# Altium PCB PowerPCB1.PcbDoc (part 2 of 2)
Units mm, origin at the board's own origin, x right, y up, seen from the top; angles counter-clockwise.
Board outline 99.06 x 99.06 mm, 2 copper layers (Top Layer, Bottom Layer); 136 components, 79 nets, 365 pads, 730 vias.
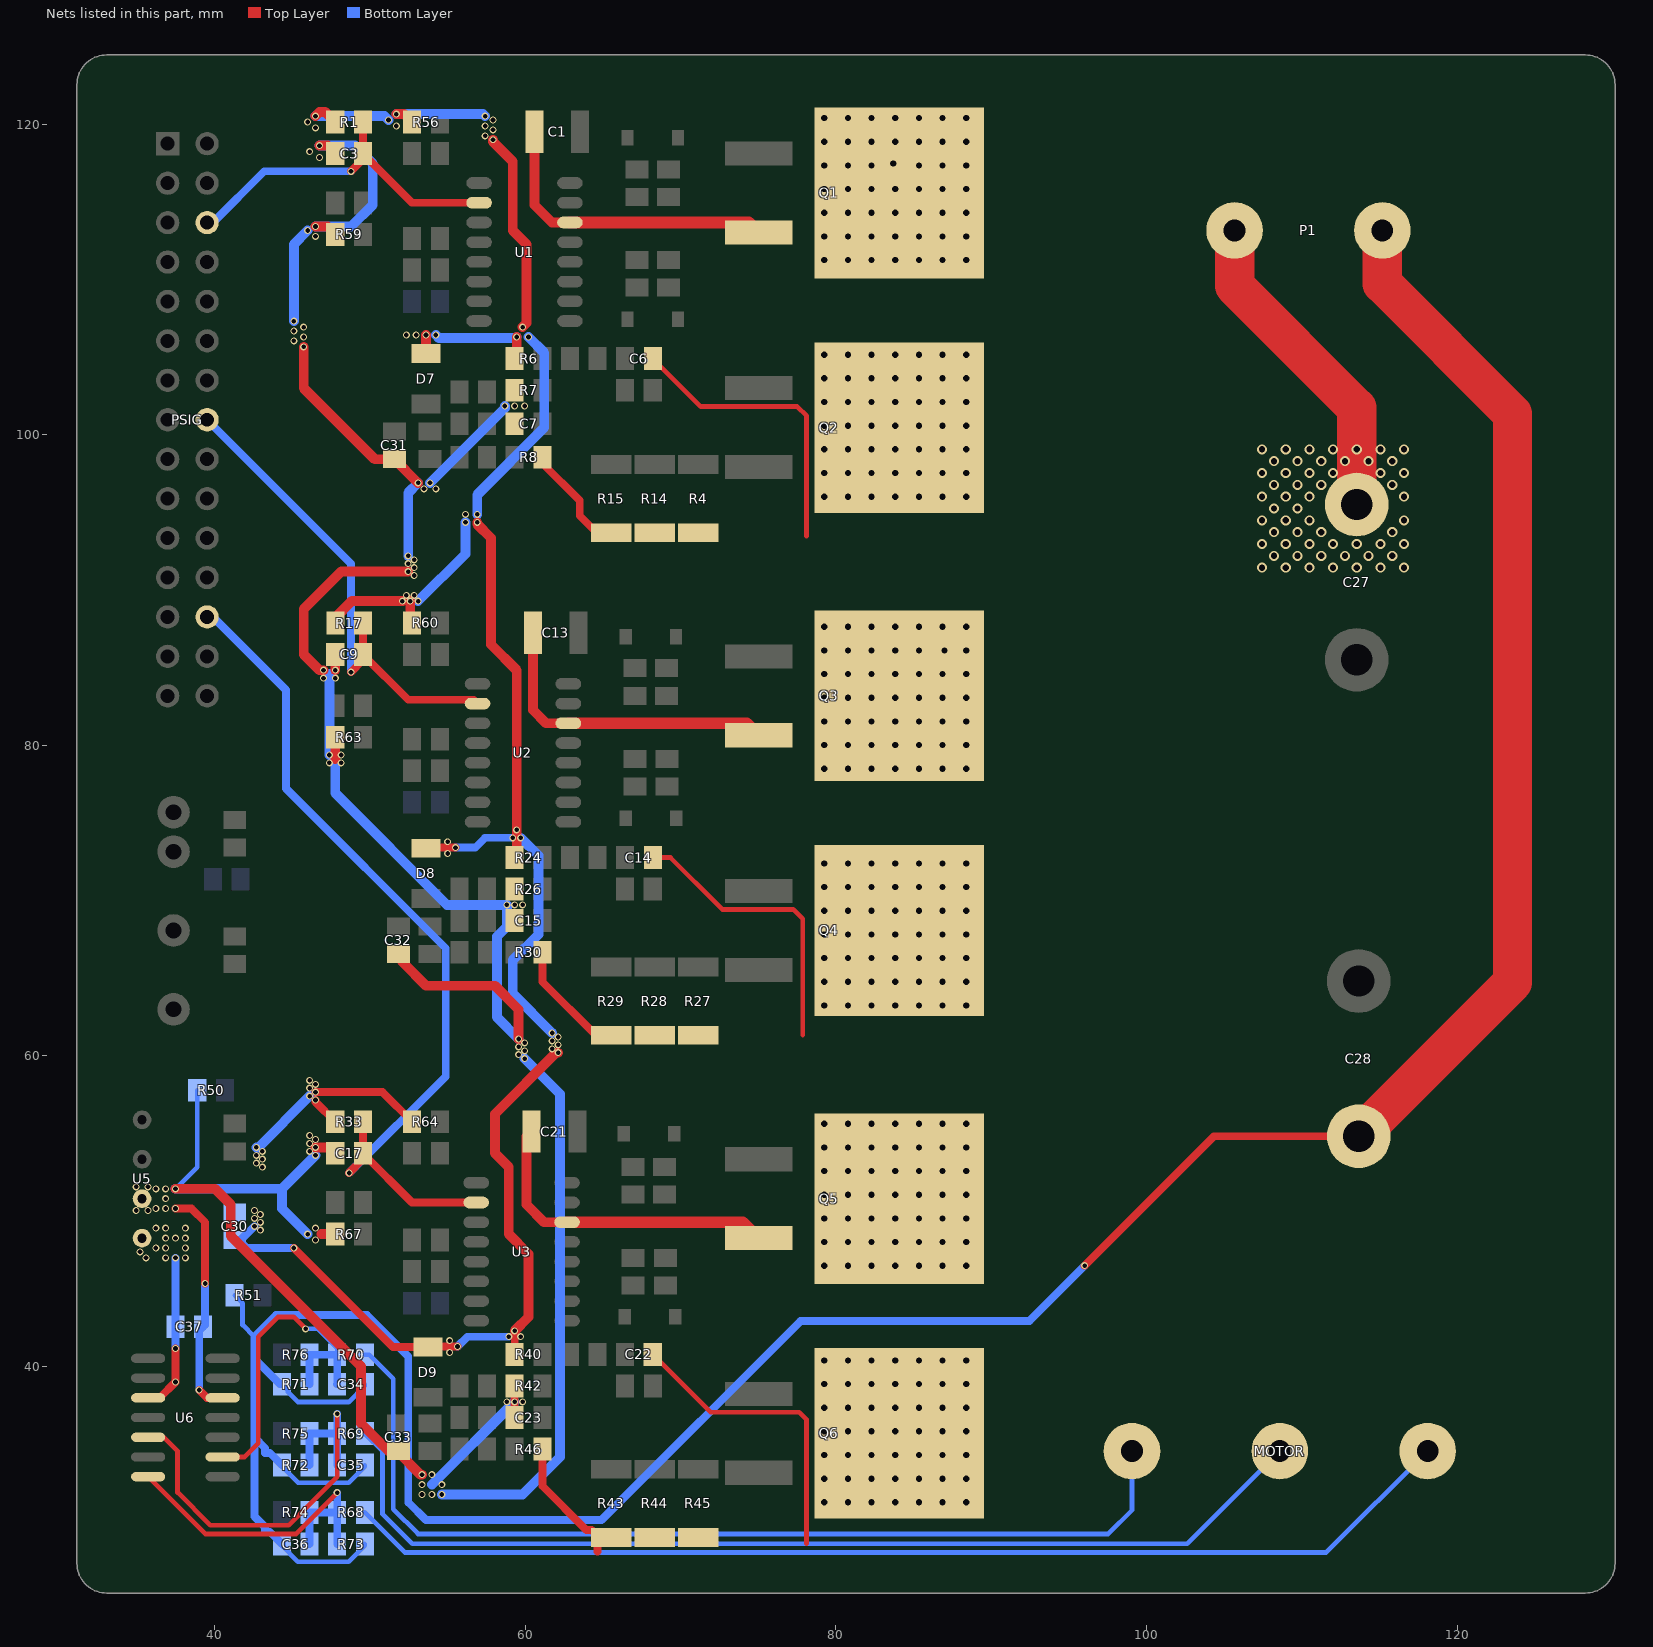
[diagram p2: the nets of this part, all layers, seen from the top]

## Via types
v1: diameter 0.45, hole 0.3, Top Layer to Bottom Layer, 379 vias
v2: diameter 0.65, hole 0.4, Top Layer to Bottom Layer, 351 vias

## Nets (pads, with @x,y where several pads share a name; then routed paths per layer and width w, separated by ;. In a path a pad name is that pad's centre, name@x,y a point inside that pad or via, vN(x,y) a via of type N, cw(c..) or ccw(c..) an arc to the next point about the centre after c; other vN are vias at no path point) (continued)
OUTA: C1.1 MOTOR.1 Q1.S Q2.D R68.2 U1.14 | length 92.1
  Top Layer w0.635: C1.1@60.579,119.507 60.579,114.808 61.714,113.673 U1.14@62.865,113.673
  Top Layer w0.762: U1.14@62.865,113.673 74.381,113.673 Q1.S@75.024,113.03
  Bottom Layer w0.305: R68.2@49.656,30.59 52.23,28.016 111.577,28.016 MOTOR.1@118.105,34.544
  other v2: 79.248,96.012 80.772,96.012 82.296,96.012 83.82,96.012 85.344,96.012 86.868,96.012 88.392,96.012 79.248,97.536 80.772,97.536 82.296,97.536 83.82,97.536 85.344,97.536 86.868,97.536 88.392,97.536 79.248,99.06 80.772,99.06 82.296,99.06 83.82,99.06 85.344,99.06 86.868,99.06 88.392,99.06 79.248,100.584 80.772,100.584 82.296,100.584 83.82,100.584 85.344,100.584 86.868,100.584 88.392,100.584 79.248,102.108 80.772,102.108 82.296,102.108 83.82,102.108 85.344,102.108 86.868,102.108 88.392,102.108 79.248,103.632 80.772,103.632 82.296,103.632 83.82,103.632 85.344,103.632 86.868,103.632 88.392,103.632 79.248,105.156 80.772,105.156 82.296,105.156 83.82,105.156 85.344,105.156 86.868,105.156 88.392,105.156
OUTB: C13.1 MOTOR.2 Q3.S Q4.D R69.2 U2.14 | length 86.9
  Top Layer w0.635: C13.1@60.478,87.249 60.478,82.27 61.333,81.415 U2.14@62.764,81.415
  Top Layer w0.762: U2.14@62.764,81.415 74.254,81.415 Q3.S@75.024,80.645
  Bottom Layer w0.305: R69.2@49.657,35.67 50.8,34.527 50.8,30.48 52.705,28.575 102.616,28.575 MOTOR.2@108.585,34.544
  other v2: 79.248,63.246 80.772,63.246 82.296,63.246 83.82,63.246 85.344,63.246 86.868,63.246 88.392,63.246 79.248,64.77 80.772,64.77 82.296,64.77 83.82,64.77 85.344,64.77 86.868,64.77 88.392,64.77 79.248,66.294 80.772,66.294 82.296,66.294 83.82,66.294 85.344,66.294 86.868,66.294 88.392,66.294 79.248,67.818 80.772,67.818 82.296,67.818 83.82,67.818 85.344,67.818 86.868,67.818 88.392,67.818 79.248,69.342 80.772,69.342 82.296,69.342 83.82,69.342 85.344,69.342 86.868,69.342 88.392,69.342 79.248,70.866 80.772,70.866 82.296,70.866 83.82,70.866 85.344,70.866 86.868,70.866 88.392,70.866 79.248,72.39 80.772,72.39 82.296,72.39 83.82,72.39 85.344,72.39 86.868,72.39 88.392,72.39
OUTC: C21.1 MOTOR.3 Q5.S Q6.D R70.2 U3.14 | length 84.2
  Top Layer w0.635: C21.1@60.392,55.118 60.071,54.797 60.071,50.419 61.206,49.284 U3.14@62.678,49.284
  Top Layer w0.762: U3.14@62.678,49.284 74,49.284 Q5.S@75.024,48.26
  Bottom Layer w0.305: R70.2@49.656,40.75 49.928,40.75 51.486,39.192 51.486,30.81 53.086,29.21 97.536,29.21 99.065,30.739 MOTOR.3@99.065,34.544
  other v2: 79.248,31.242 80.772,31.242 82.296,31.242 83.82,31.242 85.344,31.242 86.868,31.242 88.392,31.242 79.248,32.766 80.772,32.766 82.296,32.766 83.82,32.766 85.344,32.766 86.868,32.766 88.392,32.766 79.248,34.29 80.772,34.29 82.296,34.29 83.82,34.29 85.344,34.29 86.868,34.29 88.392,34.29 79.248,35.814 80.772,35.814 82.296,35.814 83.82,35.814 85.344,35.814 86.868,35.814 88.392,35.814 79.248,37.338 80.772,37.338 82.296,37.338 83.82,37.338 85.344,37.338 86.868,37.338 88.392,37.338 79.248,38.862 80.772,38.862 82.296,38.862 83.82,38.862 85.344,38.862 86.868,38.862 88.392,38.862 79.248,40.386 80.772,40.386 82.296,40.386 83.82,40.386 85.344,40.386 86.868,40.386 88.392,40.386
PGND: C6.2 C14.2 C22.2 C28.2 C34.2 C35.2 C36.2 P1.1 R4.2 R8.1 R14.2 R15.2 R27.2 R28.2 R29.2 R30.1 R43.2 R44.2 R45.2 R46.1 R51.2 R71.2 R72.2 R73.2 | length 280.9
  Top Layer w0.305: C22.2@68.199,40.767 71.92,37.046 77.635,37.046 78.105,36.576 78.105,28.575 ; C14.2@68.2,72.771 69.342,72.771 72.443,69.67 72.443,69.669 72.681,69.431 77.254,69.431 77.851,68.834 77.851,61.341 ; C6.2@68.2,104.902 71.286,101.816 77.508,101.816 78.105,101.219 78.105,93.472
  Top Layer w0.508: R46.1@61.087,34.671 61.087,32.302 63.925,29.464 64.262,29.464 64.643,29.083 64.643,28.067 ; R30.1@61.087,66.675 61.087,64.77 64.538,61.319 R29.2@64.852,61.319 ; R8.1@61.087,98.552 61.087,98.171 63.5,95.758 63.5,94.786 64.601,93.685 R15.2@65.532,93.685 ; v1(96.012,46.482) 104.347,54.817 C28.2@113.665,54.817
  Top Layer w2.54: C28.2@113.665,54.817 123.571,64.723 123.571,101.346 115.189,109.728 P1.1@115.189,113.157
  Bottom Layer w0.305: R51.2@41.274,44.577 41.783,44.068 41.783,42.67 42.544,41.909 ; R71.2@44.319,38.845 44.703,38.461 44.703,38.351 45.352,37.702 48.622,37.702 49.655,38.735 C34.2@49.655,38.845 ; R72.2@44.321,33.638 44.321,33.528 45.354,32.495 48.624,32.495 49.657,33.528 C35.2@49.657,33.638 ; C36.2@44.322,28.558 44.322,28.431 45.338,27.415 48.625,27.415 49.658,28.448 R73.2@49.658,28.558
  Bottom Layer w0.508: R71.2@44.319,38.845 44.191,38.845 42.544,40.491 ; R72.2@44.321,33.638 43.532,34.427 43.233,34.427 43.233,34.726 42.544,35.415 ; C36.2@44.322,28.558 43.533,29.347 43.232,29.347 43.232,29.648 42.544,30.336 42.544,35.415 ; v1(96.012,46.482) 92.456,42.926 77.724,42.926 64.897,30.099 53.594,30.099 52.451,31.242 52.451,40.64 49.784,43.307 43.942,43.307 42.544,41.909 42.544,40.491 ; 42.544,35.415 42.544,40.491
PHASE_A: C36.1 R68.1 R73.1 R74.2 U6.7 | length 21.9
  Top Layer w0.305: U6.7@35.7,32.893 39.383,29.21 45.228,29.21 v1(47.878,31.86)
  Bottom Layer w0.508: C36.1@46.102,28.558 46.1,28.56 R74.2@46.1,30.59 R68.1@47.876,30.59 ; R73.1@47.878,28.558 47.876,28.56 R68.1@47.876,30.59 ; v1@47.878,31.834 47.876,31.832 R68.1@47.876,30.59
PHASE_B: C35.1 R69.1 R72.1 R75.2 U6.5 | length 28.5
  Top Layer w0.305: U6.5@35.7,35.433 36.703,35.433 37.592,34.544 37.592,31.877 39.7,29.769 44.755,29.769 47.878,32.892 v1(47.878,36.94)
  Bottom Layer w0.508: R72.1@46.101,33.638 R75.2@46.101,35.67 R69.1@47.877,35.67 ; C35.1@47.877,33.638 R69.1@47.877,35.67 ; v1(47.878,36.94) 47.878,35.671 R69.1@47.877,35.67
PHASE_C: C34.1 R70.1 R71.1 R76.2 U6.9 | length 22
  Top Layer w0.305: U6.9@40.5,34.163 41.91,34.163 42.799,35.052 42.799,41.91 44.069,43.18 45.085,43.18 v1(45.847,42.418)
  Bottom Layer w0.305: v1(45.847,42.418) 46.609,42.418 47.876,41.151 R70.1@47.876,40.75
  Bottom Layer w0.508: R71.1@46.099,38.845 R76.2@46.099,40.75 R70.1@47.876,40.75 47.876,38.846 C34.1@47.875,38.845
PVCC: C27.1 P1.2 Q1.D Q3.D Q5.D | length 28.4
  Top Layer w2.54: Q3.D@84.074,83.185 v2(86.995,86.106) Q3.D@88.265,87.376 ; Q1.D@84.074,115.57 Q1.D@85.598,115.57 ; P1.2@105.669,113.157 105.669,109.596 113.538,101.727 v2(113.538,99.06) C27.1@113.538,95.504
  other v2: 79.248,46.482 80.772,46.482 82.296,46.482 83.82,46.482 85.344,46.482 86.868,46.482 88.392,46.482 79.248,48.006 80.772,48.006 82.296,48.006 83.82,48.006 85.344,48.006 86.868,48.006 88.392,48.006 79.248,49.53 80.772,49.53 82.296,49.53 83.82,49.53 85.344,49.53 86.868,49.53 88.392,49.53 79.248,51.054 80.772,51.054 82.296,51.054 83.82,51.054 85.344,51.054 86.868,51.054 88.392,51.054 79.248,52.578 80.772,52.578 82.296,52.578 83.82,52.578 85.344,52.578 86.868,52.578 88.392,52.578 79.248,54.102 80.772,54.102 82.296,54.102 83.82,54.102 85.344,54.102 86.868,54.102 88.392,54.102 79.248,55.626 80.772,55.626 82.296,55.626 83.82,55.626 85.344,55.626 86.868,55.626 88.392,55.626 79.248,78.486 80.772,78.486 82.296,78.486 83.82,78.486 85.344,78.486 86.868,78.486 88.392,78.486 79.248,80.01 80.772,80.01 82.296,80.01 83.82,80.01 85.344,80.01 86.868,80.01 88.392,80.01 79.248,81.534 80.772,81.534 82.296,81.534 83.82,81.534 85.344,81.534 86.868,81.534 88.392,81.534 79.248,83.058 80.772,83.058 82.296,83.058 83.82,83.058 85.344,83.058 86.868,83.058 88.392,83.058 79.248,84.582 80.772,84.582 82.296,84.582 83.82,84.582 85.344,84.582 86.868,84.582 88.392,84.582 79.248,86.106 80.772,86.106 82.296,86.106 83.82,86.106 85.344,86.106 88.392,86.106 79.248,87.63 80.772,87.63 82.296,87.63 83.82,87.63 85.344,87.63 86.868,87.63 88.392,87.63 107.442,91.44 108.966,91.44 110.49,91.44 112.014,91.44 113.538,91.44 115.062,91.44 116.586,91.44 108.204,92.202 109.728,92.202 111.252,92.202 112.776,92.202 114.3,92.202 115.824,92.202 107.442,92.964 108.966,92.964 110.49,92.964 112.014,92.964 113.538,92.964 115.062,92.964 116.586,92.964 108.204,93.726 109.728,93.726 111.252,93.726 115.824,93.726 107.442,94.488 108.966,94.488 110.49,94.488 116.586,94.488 108.204,95.25 109.728,95.25 107.442,96.012 108.966,96.012 110.49,96.012 116.586,96.012 108.204,96.774 109.728,96.774 111.252,96.774 115.824,96.774 107.442,97.536 108.966,97.536 110.49,97.536 112.014,97.536 115.062,97.536 116.586,97.536 108.204,98.298 109.728,98.298 111.252,98.298 112.776,98.298 114.3,98.298 115.824,98.298 107.442,99.06 108.966,99.06 110.49,99.06 112.014,99.06 115.062,99.06 116.586,99.06 79.248,111.252 80.772,111.252 82.296,111.252 83.82,111.252 85.344,111.252 86.868,111.252 88.392,111.252 79.248,112.776 80.772,112.776 82.296,112.776 83.82,112.776 85.344,112.776 86.868,112.776 88.392,112.776 79.248,114.3 80.772,114.3 82.296,114.3 83.82,114.3 85.344,114.3 86.868,114.3 88.392,114.3 79.248,115.824 80.772,115.824 82.296,115.824 83.82,115.824 85.344,115.824 86.868,115.824 88.392,115.824 79.248,117.348 80.772,117.348 82.296,117.348 85.344,117.348 86.868,117.348 88.392,117.348 83.693,117.476 79.248,118.872 80.772,118.872 82.296,118.872 83.82,118.872 85.344,118.872 86.868,118.872 88.392,118.872 79.248,120.396 80.772,120.396 82.296,120.396 83.82,120.396 85.344,120.396 86.868,120.396 88.392,120.396
SDODA: C3.1 PSIG.6 R1.2 U1.2 | length 22.9
  Top Layer w0.508: v1(48.768,116.967) 49.53,117.729 C3.1@49.53,118.11 ; R1.2@49.53,120.132 C3.1@49.53,118.11 ; U1.2@57.015,114.943 52.697,114.943 C3.1@49.53,118.11
  Bottom Layer w0.508: PSIG.6@39.497,113.665 39.878,113.665 43.18,116.967 v1(48.768,116.967)
SDODB: C9.1 PSIG.16 R17.2 U2.2 | length 32.3
  Top Layer w0.508: v1(48.768,84.709) 49.53,85.471 C9.1@49.53,85.852 ; R17.2@49.532,87.874 49.532,85.854 C9.1@49.53,85.852 ; U2.2@56.914,82.685 56.668,82.931 52.451,82.931 C9.1@49.53,85.852
  Bottom Layer w0.508: PSIG.16@39.497,100.965 48.768,91.694 v1(48.768,84.709)
SDODC: C17.1 PSIG.26 R33.2 U3.2 | length 57.3
  Top Layer w0.508: v1(48.641,52.451) 49.53,53.34 C17.1@49.53,53.721 ; R33.2@49.53,55.753 C17.1@49.53,53.721 ; U3.2@56.828,50.554 52.697,50.554 C17.1@49.53,53.721
  Bottom Layer w0.508: PSIG.26@39.497,88.265 39.878,88.265 44.577,83.566 44.577,77.216 54.864,66.929 54.864,58.674 v1(48.641,52.451)
SGND: C3.2 C7.2 C9.2 C15.2 C17.2 C23.2 C30.2 C31.2 C32.2 C33.2 C37.1 R7.1 R26.1 R42.1 R50.2 R59.1 R63.1 R67.1 U5.3 U6.12 | length 210.6
  Top Layer w0.508: v1(37.465,50.165) 38.481,50.165 39.37,49.276 v1(39.37,45.339) ; v1(38.989,38.481) 39.497,37.973 U6.12@40.5,37.973 ; C23.2@59.307,36.703 R42.1@59.307,38.735
  Top Layer w0.635: v1(37.465,51.435) 40.005,51.435 41.021,50.419 41.021,48.387 49.403,40.005 49.403,36.322 51.181,34.544 C33.2@51.816,34.544 51.816,34.453 53.249,33.02 v1(53.34,33.02) ; v1(45.72,105.664) 45.72,102.997 50.293,98.424 C31.2@51.562,98.424 v1(53.086,96.901) ; v1(46.482,54.102) 47.369,54.102 C17.2@47.75,53.721 ; v1(46.482,113.411) 47.242,113.411 R59.1@47.75,112.903 ; v1(46.736,118.618) 47.242,118.618 C3.2@47.75,118.11 ; 46.863,48.514 R67.1@47.75,48.514 ; v1(46.99,84.836) 46.736,84.836 45.72,85.852 45.72,88.773 48.133,91.186 v1(52.451,91.186) ; R63.1@47.75,80.518 47.752,80.516 47.752,79.121 ; C9.2@47.75,85.852 47.75,84.838 v1(47.752,84.836) ; C32.2@51.816,66.548 52.07,66.294 52.07,66.04 53.594,64.516 58.039,64.516 59.563,62.992 v1(59.563,61.087)
  Bottom Layer w0.305: v1(37.465,51.435) 38.862,52.832 R50.2@38.862,57.785
  Bottom Layer w0.508: v1(38.989,38.481) 38.989,42.29 C37.1@39.244,42.545 39.37,42.671 v1(39.37,45.339)
  Bottom Layer w0.635: v1(37.465,51.435) 44.323,51.435 ; v1(45.085,107.315) 45.085,112.268 v1(45.974,113.157) ; v1(45.974,48.514) 44.323,50.165 44.323,51.435 ; v1(46.482,53.594) 44.323,51.435 ; v1(46.482,113.411) 48.768,113.411 50.165,114.808 50.165,117.475 49.022,118.618 v1(46.736,118.618) ; v1(47.371,79.375) 47.371,84.582 ; 47.752,79.121 47.752,76.916 54.945,69.723 v1(58.801,69.723) 58.801,68.326 58.166,67.691 58.166,62.484 v1(59.563,61.087) ; v1(52.451,92.202) 52.451,96.266 v1(53.086,96.901) ; v1(53.848,96.901) 58.674,101.727 v1(58.674,101.854) ; 53.975,32.385 v1(59.309,37.719) ; v1(54.61,31.75) 59.817,31.75 62.23,34.163 62.23,57.531 v1(59.944,59.817)
  other v1: 53.34,31.75 53.975,31.75 53.34,32.385 54.61,32.385 53.975,33.02 58.801,37.719 59.817,37.719 46.482,48.133 46.482,48.895 34.925,50.038 35.687,50.038 36.195,50.165 36.83,50.165 36.83,50.8 36.195,51.435 36.83,51.435 34.925,51.562 35.687,51.562 46.101,53.848 46.101,54.356 46.482,54.61 46.101,54.864 59.563,60.071 59.944,60.325 59.563,60.579 59.944,60.833 59.309,69.723 59.817,69.723 47.371,78.867 48.133,78.867 48.133,79.375 46.99,84.328 47.752,84.328 52.832,90.932 52.832,91.44 52.451,91.694 52.832,91.948 53.467,96.52 54.229,96.52 59.309,101.854 59.944,101.854 45.085,106.045 45.72,106.299 45.085,106.68 45.72,106.934 46.482,112.776 46.736,117.856 46.101,118.237
SVCC: C30.1 C37.2 D7.2 D8.2 D9.2 R1.1 R6.2 R17.1 R24.2 R33.1 R40.2 R56.2 R60.2 R64.2 U5.4 U6.3 | length 172.6
  Top Layer w0.508: U6.3@35.7,37.973 36.449,37.973 v1(37.465,38.989) v1(37.465,41.148) ; v1(45.085,47.625) 51.461,41.249 D9.2@53.721,41.249 53.747,41.275 v1(55.626,41.275) ; v1(46.482,57.15) 46.482,57.021 R33.1@47.75,55.753 ; v1(46.482,57.658) 50.799,57.658 R64.2@52.704,55.753 ; D8.2@53.62,73.406 v1(55.499,73.406) ; R40.2@59.308,40.767 R40.2@59.308,40.767 v1(59.309,42.291)
  Top Layer w0.635: v1(46.482,120.523) 46.736,120.777 47.105,120.777 R1.1@47.75,120.132 ; R17.1@47.752,87.874 47.752,88.217 48.816,89.281 v1(52.07,89.281) ; v1(51.689,120.65) 52.187,120.65 R56.2@52.705,120.132 ; v1(52.578,89.281) 52.578,88.01 R60.2@52.704,87.884 ; D7.2@53.594,105.231 v1(53.594,106.426) ; v1(56.896,94.361) 56.896,94.234 57.785,93.345 57.785,86.487 59.436,84.836 v1(59.436,74.549) 59.436,72.899 R24.2@59.308,72.771 ; v1(57.912,118.999) 57.912,118.872 59.182,117.602 59.182,113.157 60.071,112.268 60.071,107.188 v1(59.817,106.934) ; R6.2@59.307,104.902 59.436,105.031 v1(59.436,106.299) ; v1(59.309,42.291) 60.198,43.18 60.198,47.244 58.928,48.514 58.928,52.832 58.039,53.721 58.039,56.261 61.976,60.198 v1(62.103,60.198)
  Bottom Layer w0.508: v1(37.465,41.148) C37.2@37.464,42.545 C37.2@37.464,42.545 v1(37.465,46.99) v1(37.465,46.99) ; v1(42.545,49.022) 41.655,48.132 41.528,48.132 42.035,47.625 v1(45.085,47.625) ; v1(55.499,73.406) 56.769,73.406 57.404,74.041 v1(59.182,74.041) ; v1(55.626,41.275) 56.261,41.91 v1(58.928,41.91)
  Bottom Layer w0.635: v1(42.672,54.102) 42.799,54.102 v1(46.101,57.404) ; v1(46.482,120.523) 50.927,120.523 v1(51.181,120.269) ; v1(51.689,120.65) 57.277,120.65 v1(57.404,120.523) ; v1(53.086,89.281) 56.134,92.329 v1(56.134,94.361) ; v1(54.229,106.426) 54.42,106.235 59.372,106.235 v1(59.436,106.299) ; v1(56.896,94.869) 56.896,96.139 61.214,100.457 61.214,105.283 v1(60.198,106.299) ; v1(59.69,74.041) 60.833,72.898 60.833,67.818 59.182,66.167 59.182,64.008 v1(61.722,61.468)
  other v1: 55.118,40.894 55.118,41.656 59.69,41.91 35.56,46.99 36.83,46.99 38.1,46.99 35.179,47.371 36.195,47.625 36.83,47.625 38.1,47.625 36.83,48.26 37.465,48.26 38.1,48.26 42.926,48.768 36.195,48.895 36.83,48.895 38.1,48.895 42.926,49.276 42.545,49.53 42.926,49.784 42.545,50.038 43.053,52.832 42.672,53.086 43.053,53.34 42.672,53.594 43.053,53.848 46.101,57.912 46.482,58.166 46.101,58.42 61.722,60.452 62.103,60.706 61.722,60.96 62.103,61.214 54.991,73.025 54.991,73.787 52.324,89.662 52.832,89.662 56.134,94.869 52.324,106.426 52.959,106.426 57.404,119.253 57.912,119.634 46.482,119.761 51.689,119.888 57.404,119.888 45.974,120.142 57.912,120.269
pads on no net: PSIG.7 PSIG.9 PSIG.10 PSIG.11 PSIG.13 PSIG.15 PSIG.17 PSIG.19 PSIG.20 PSIG.21 PSIG.30 U1.12 U1.13 U2.12 U2.13 U3.12 U3.13 U6.10 U6.11 U6.13

## Polygon pours and split planes (outlines as drawn)
GND on Top Layer "G1" (solid, remove dead copper, pour order 2): 31.115,124.46 44.45,124.46 44.45,43.942 44.577,43.815 31.115,43.815
GND on Bottom Layer "G1" (solid, remove dead copper, pour order 4): 31.115,124.46 44.45,124.46 44.45,43.815 31.115,43.815

## Keep-outs
Keep-Out Layer:
  circle w0.254: c127,121.285 r1.6
  circle w0.254: c127,28.575 r1.6
  circle w0.254: c34.29,28.575 r1.6
  circle w0.254: c34.29,121.285 r1.397
  lines w0.254: 31.115,27.305 ccw(c33.02,27.305) 33.02,25.4 128.27,25.4 ccw(c128.27,27.305) 130.175,27.305 130.175,122.555 ccw(c128.27,122.555) 128.27,124.46 33.02,124.46 ccw(c33.02,122.555) 31.115,122.555 31.115,27.305

## Other copper
Top Layer:
  rectangle net SGND: 58.547,69.342 60.071,70.104
  rectangle net SVCC: 42.418,50.038 43.18,52.832
  rectangle net SGND: 58.547,37.338 60.071,38.1
  rectangle net DGND: 51.689,61.849 57.404,63.881
  rectangle net DGND: 54.991,74.549 55.88,75.565
  rectangle net DGND: 51.435,78.486 53.213,80.264
  rectangle net DGND: 47.498,67.691 49.276,71.374
  rectangle net DVCC: 36.83,61.214 39.624,64.008
  rectangle net DGND: 36.576,68.199 40.386,70.104
  rectangle net DVCC: 48.514,109.474 50.546,111.506
  rectangle net DVCC: 48.895,76.581 51.181,78.613
  rectangle net DVCC: 48.514,61.214 50.546,65.405
  rectangle net NetQ6_S: 64.135,29.972 77.216,36.195
  rectangle net NetQ4_S: 64.135,62.611 77.216,68.834
  rectangle net NetQ2_S: 64.135,94.869 77.216,101.346
  rectangle net PGND: 64.262,26.289 91.44,29.591
  rectangle net PGND: 64.262,57.023 98.425,61.849
  rectangle net PGND: 64.262,89.535 96.52,94.234
  rectangle net SGND: 58.547,101.346 60.071,102.235
  rectangle net GND: 41.656,57.023 42.164,58.547
  rectangle net GND: 42.545,71.755 43.053,73.152
  region net SGND: 46.863,85.09 46.609,84.836 46.609,84.328 46.863,84.074 47.879,84.074 48.133,84.328 48.133,84.836 47.879,85.09
  region net SGND: 47.244,79.629 46.99,79.375 46.99,78.867 47.244,78.613 48.26,78.613 48.514,78.867 48.514,79.375 48.26,79.629
  region net SVCC: 59.309,74.803 59.563,74.803 60.071,74.295 60.071,73.914 59.944,73.787 58.928,73.787 58.801,73.914 58.801,74.295
  region net SVCC: 55.753,73.152 55.753,73.66 55.372,74.041 54.864,74.041 54.61,73.787 54.61,73.025 54.864,72.771 55.372,72.771
  region net SGND: 59.69,61.468 59.436,61.341 59.309,61.277 59.309,59.817 59.563,59.563 60.071,59.563 60.198,59.69 60.198,61.087 60.071,61.341
  region net SVCC: 61.849,61.849 61.595,61.722 61.468,61.658 61.468,60.198 61.722,59.944 62.23,59.944 62.357,60.071 62.357,61.468 62.23,61.722
  region net SVCC: 42.799,54.483 42.545,54.356 42.418,54.292 42.418,52.832 42.672,52.578 43.18,52.578 43.307,52.705 43.307,54.102 43.18,54.356
  region net SVCC: 42.799,54.483 42.545,54.356 42.418,54.292 42.418,52.832 42.672,52.578 43.18,52.578 43.307,52.705 43.307,54.102 43.18,54.356
  region net SVCC: 42.672,50.419 42.418,50.292 42.291,50.228 42.291,48.768 42.545,48.514 43.053,48.514 43.18,48.641 43.18,50.038 43.053,50.292
  region net SVCC: 42.672,50.419 42.418,50.292 42.291,50.228 42.291,48.768 42.545,48.514 43.053,48.514 43.18,48.641 43.18,50.038 43.053,50.292
  region net SGND: 46.228,55.245 45.974,55.118 45.847,55.054 45.847,53.594 46.101,53.34 46.609,53.34 46.736,53.467 46.736,54.864 46.609,55.118
  region net SVCC: 46.228,58.801 45.974,58.674 45.847,58.61 45.847,57.15 46.101,56.896 46.609,56.896 46.736,57.023 46.736,58.42 46.609,58.674
  region net SGND: 46.228,55.245 45.974,55.118 45.847,55.054 45.847,53.594 46.101,53.34 46.609,53.34 46.736,53.467 46.736,54.864 46.609,55.118
  region net SGND: 46.609,49.149 46.101,49.149 45.72,48.768 45.72,48.26 46.101,47.879 46.609,47.879 46.863,48.133 46.863,48.895
  region net SGND: 53.467,33.401 53.086,33.274 52.959,33.147 52.959,31.75 53.34,31.369 54.61,31.369 54.991,31.75 54.991,32.385 53.975,33.401
  region net SVCC: 55.88,41.021 55.88,41.529 55.499,41.91 54.991,41.91 54.737,41.656 54.737,40.894 54.991,40.64 55.499,40.64
  region net SVCC: 59.182,42.672 59.436,42.672 59.944,42.164 59.944,41.783 59.817,41.656 58.801,41.656 58.674,41.783 58.674,42.164
  region net DVCC: 48.768,46.863 48.387,46.482 48.387,45.212 48.768,44.831 50.419,44.831 50.673,45.085 50.673,46.482 50.292,46.863
  region net SGND: 34.798,51.943 34.544,51.689 34.544,49.911 34.798,49.657 37.719,49.657 38.1,50.038 38.1,51.562 37.719,51.943
  region net SVCC: 35.306,49.276 34.671,48.641 34.671,47.117 35.179,46.609 38.354,46.609 38.735,46.99 38.735,48.895 38.354,49.276
  region net DGND: 55.572,43.507 55.118,43.053 55.118,42.799 55.572,42.345 56.261,42.621 56.261,43.231
  region net DGND: 51.562,47.879 51.181,47.498 51.181,46.609 51.562,46.228 52.451,46.228 52.451,47.879
  region net DGND: 56.134,107.696 55.499,107.95 55.118,107.569 55.118,106.934 55.499,106.68 56.134,106.934
  region net DGND: 53.213,112.522 51.435,112.522 50.927,112.014 50.927,111.252 51.435,110.744 53.213,110.744
  region net OUTC: 71.755,51.816 70.485,50.546 70.485,47.117 72.009,45.593 72.009,41.021 73.406,39.624 77.216,39.624 78.613,38.227 89.535,38.227 89.535,43.561 88.519,44.577 78.867,44.577 77.851,45.593 77.851,50.927 76.962,51.816
  region net OUTA: 77.597,104.267 77.724,104.267 78.613,103.378 79.248,103.378 79.248,104.394 78.994,104.648 77.851,104.648 77.851,104.521
  region net OUTB: 72.009,84.074 70.485,82.55 70.485,79.121 71.882,77.724 71.882,73.787 73.66,72.009 77.216,72.009 78.613,70.612 89.535,70.612 89.535,76.073 88.9,76.708 88.773,76.835 78.74,76.835 78.105,77.47 78.105,81.915 75.946,84.074
  region net OUTA: 72.263,115.57 71.247,114.554 71.247,110.998 71.882,110.363 71.882,106.553 74.168,104.267 89.154,104.267 89.535,104.648 89.535,107.569 87.757,109.347 78.232,109.347 77.851,109.728 77.851,113.665 75.946,115.57
  region net PVCC: 91.313,107.823 91.948,107.188 91.948,101.346 97.536,95.758 102.997,90.297 108.331,90.297 108.966,90.932 92.71,107.188 92.71,106.68 91.948,105.918
  region net PVCC: 86.868,121.031 94.107,121.031 99.568,115.57 99.568,107.696 106.807,97.663 108.966,97.79 111.76,94.996 111.76,90.297 106.934,90.297 83.693,114.684 83.693,120.269 86.106,120.269
  region net PGND: 90.17,28.956 91.44,30.226 91.44,36.703 102.108,47.371 102.108,53.848 103.124,54.864 106.68,54.864 106.68,54.737 111.76,49.657 111.633,47.752 107.188,46.99 95.377,35.179 95.377,28.321 93.345,26.289 91.44,26.289 90.17,27.559
  region net PGND: 96.52,94.234 103.505,87.857 103.505,64.897 105.283,62.865 107.823,60.325 106.045,58.547 111.633,47.752 102.108,52.832 97.917,57.023 97.917,84.582 91.992,90.507 93.98,92.329
  region net NetC27_2: 108.077,89.662 105.029,86.614 105.029,65.786 109.22,61.595 114.935,61.595 118.491,65.151 118.491,86.868 115.697,89.662
  region net PGND: 111.125,116.205 114.935,120.015 120.015,120.015 128.397,111.633 128.397,55.372 120.777,47.752 111.633,47.752 106.045,53.34 106.045,58.547 107.823,60.325 114.935,60.325 119.38,64.77 119.38,100.602 111.125,110.744
  region net PVCC: 104.775,118.491 101.713,117.685 100.457,116.29 100.457,107.823 107.442,97.79 107.95,92.075 111.684,90.297 115.824,90.297 117.602,92.075 117.602,100.076 109.855,109.855 109.855,116.459 107.823,118.491
  region net SVCC: 56.007,95.123 55.753,94.869 55.753,94.361 56.007,94.107 57.023,94.107 57.277,94.361 57.277,94.869 57.023,95.123
  region net SVCC: 52.07,90.043 51.816,89.789 51.816,89.027 53.34,89.027 53.34,89.789 53.086,90.043
  region net SGND: 52.476,92.589 52.857,92.462 53.111,92.208 53.111,90.748 52.553,90.608 52.222,90.938 52.222,92.462 52.349,92.589
  region net SGND: 52.959,97.155 52.705,96.901 52.705,96.647 53.086,96.266 54.356,96.266 54.483,96.393 54.483,96.647 53.975,97.155
  region net SVCC: 59.563,107.188 59.182,106.807 59.182,106.045 60.388,106.045 60.506,106.753 60.071,107.188
  region net SVCC: 52.197,106.807 51.943,106.553 51.943,106.172 52.07,106.045 52.197,106.045 52.324,106.045 54.483,106.045 54.61,106.68 54.483,106.807 54.356,106.807
  region net SVCC: 57.277,120.904 57.023,120.65 57.023,119.126 57.531,118.618 58.039,118.618 58.293,118.872 58.293,120.396 57.785,120.904
  region net SVCC: 51.308,120.904 50.927,120.523 50.927,120.015 51.308,119.634 51.943,119.634 51.943,120.904
  region net SVCC: 46.101,120.777 45.72,120.396 45.72,119.888 46.101,119.507 46.736,119.507 46.736,120.777
  region net SGND: 44.958,107.823 44.704,107.569 44.704,105.791 45.212,105.283 45.974,105.283 46.228,105.537 46.228,107.188 45.593,107.823
  region net SGND: 46.609,118.872 46.863,118.872 46.99,118.745 46.99,117.729 46.863,117.602 46.228,117.602 45.847,117.983 45.847,118.491 46.101,118.745
  region net SGND: 46.419,113.728 46.672,113.728 46.799,113.602 46.799,112.585 46.672,112.459 46.038,112.459 45.657,112.84 45.657,113.347 45.91,113.602
Bottom Layer:
  rectangle net SGND: 58.547,69.342 60.071,70.104
  rectangle net SGND: 58.547,37.338 60.071,38.1
  rectangle net SGND: 37.211,49.657 41.021,50.419
  rectangle net SVCC: 38.1,47.625 40.767,48.641
  rectangle net DGND: 55.626,61.849 57.404,63.881
  rectangle net DGND: 51.689,61.849 53.721,63.881
  rectangle net DGND: 51.435,78.232 53.213,80.264
  rectangle net DGND: 47.498,70.231 49.276,71.374
  rectangle net DGND: 36.83,67.183 49.276,70.231
  rectangle net DVCC: 48.387,44.831 50.673,46.863
  rectangle net DVCC: 48.514,109.474 50.546,111.506
  rectangle net DVCC: 48.895,76.581 51.054,78.613
  rectangle net DVCC: 36.83,61.214 50.546,65.024
  rectangle net PVCC: 105.791,88.646 117.094,99.695
  rectangle net PVCC: 78.994,44.958 90.424,56.388
  rectangle net PVCC: 72.517,77.724 92.202,92.583
  rectangle net PVCC: 78.486,109.728 89.154,121.158
  rectangle net OUTA: 78.74,94.869 89.789,105.918
  rectangle net OUTB: 78.74,62.484 89.662,73.66
  rectangle net OUTC: 78.613,29.845 96.266,41.148
  rectangle net SGND: 58.547,101.346 60.071,102.235
  rectangle net GND: 41.656,57.023 42.164,58.547
  rectangle net GND: 42.545,71.755 43.053,73.152
  region net SGND: 46.863,85.09 46.609,84.836 46.609,84.328 46.863,84.074 47.879,84.074 48.133,84.328 48.133,84.836 47.879,85.09
  region net SGND: 47.244,79.629 46.99,79.375 46.99,78.867 47.244,78.613 48.26,78.613 48.514,78.867 48.514,79.375 48.26,79.629
  region net SVCC: 59.309,74.803 59.563,74.803 60.071,74.295 60.071,73.914 59.944,73.787 58.928,73.787 58.801,73.914 58.801,74.295
  region net SVCC: 55.753,73.152 55.753,73.66 55.372,74.041 54.864,74.041 54.61,73.787 54.61,73.025 54.864,72.771 55.372,72.771
  region net SGND: 59.69,61.468 59.436,61.341 59.309,61.277 59.309,59.817 59.563,59.563 60.071,59.563 60.198,59.69 60.198,61.087 60.071,61.341
  region net SVCC: 61.849,61.849 61.595,61.722 61.468,61.658 61.468,60.198 61.722,59.944 62.23,59.944 62.357,60.071 62.357,61.468 62.23,61.722
  region net SVCC: 42.799,54.483 42.545,54.356 42.418,54.292 42.418,52.832 42.672,52.578 43.18,52.578 43.307,52.705 43.307,54.102 43.18,54.356
  region net SVCC: 42.672,50.419 42.418,50.292 42.291,50.228 42.291,48.768 42.545,48.514 43.053,48.514 43.18,48.641 43.18,50.038 43.053,50.292
  region net SGND: 46.609,49.149 46.101,49.149 45.72,48.768 45.72,48.26 46.101,47.879 46.609,47.879 46.863,48.133 46.863,48.895
  region net SGND: 46.228,55.245 45.974,55.118 45.847,55.054 45.847,53.594 46.101,53.34 46.609,53.34 46.736,53.467 46.736,54.864 46.609,55.118
  region net SVCC: 46.228,58.801 45.974,58.674 45.847,58.61 45.847,57.15 46.101,56.896 46.609,56.896 46.736,57.023 46.736,58.42 46.609,58.674
  region net SGND: 53.467,33.401 53.086,33.274 52.959,33.147 52.959,31.75 53.34,31.369 54.61,31.369 54.991,31.75 54.991,32.385 53.975,33.401
  region net SVCC: 55.88,41.021 55.88,41.529 55.499,41.91 54.991,41.91 54.737,41.656 54.737,40.894 54.991,40.64 55.499,40.64
  region net SVCC: 59.182,42.672 59.436,42.672 59.944,42.164 59.944,41.783 59.817,41.656 58.801,41.656 58.674,41.783 58.674,42.164
  region net SVCC: 35.242,49.276 34.671,48.704 34.671,47.053 35.115,46.609 38.291,46.609 38.672,46.99 38.672,48.895 38.291,49.276
  region net SGND: 34.861,51.943 34.608,51.689 34.608,49.911 34.861,49.657 37.782,49.657 38.163,50.038 38.163,51.562 37.782,51.943
  region net DGND: 55.689,43.497 55.118,42.926 55.118,42.64 55.518,42.34 55.992,42.442 56.008,43.391
  region net DGND: 51.562,47.879 51.181,47.498 51.181,46.609 51.562,46.228 52.451,46.228 52.451,47.879
  region net DGND: 55.499,107.823 55.118,107.442 55.118,107.188 55.499,106.807 56.007,106.807 56.261,107.061 56.261,107.569 56.007,107.823
  region net DGND: 51.435,112.522 50.927,112.014 50.927,111.252 51.435,110.744 53.213,110.744 53.213,111.887 52.578,112.522
  region net DGND: 56.007,75.565 55.499,75.565 55.118,75.184 55.118,74.93 55.499,74.549 56.007,74.549
  region net PVCC: 99.887,74.549 78.486,74.549 77.089,73.152 73.533,76.708 74.168,76.708 76.708,79.248 77.089,78.867 100.965,78.867 107.188,77.915
  region net PVCC: 77.089,92.583 71.628,92.583 65.405,86.36 65.405,53.467 73.914,44.958 83.058,44.958 85.598,47.498 89.916,56.388 81.28,60.071 77.089,61.722
  region net PVCC: 106.553,99.758 96.52,99.758 84.201,87.439 84.201,77.915 84.074,77.787 107.188,77.915 112.268,88.709 112.268,93.916 106.553,99.632
  region net OUTA: 124.714,109.982 128.397,106.299 128.397,35.56 122.682,29.845 116.205,29.845 114.3,31.75 114.3,38.1 117.856,41.656 117.856,100.203 116.967,101.092 96.012,101.092 89.789,94.869 84.709,94.869 84.709,103.505 91.186,109.982
  region net OUTB: 78.74,62.992 78.74,61.849 95.25,57.023 104.14,44.577 104.14,32.385 106.68,29.845 111.252,29.845 113.284,31.877 113.284,49.657 94.996,73.66 92.71,73.66 88.9,73.66
  region net OUTC: 95.25,41.148 99.822,41.148 103.505,37.465 103.505,32.639 100.711,29.845 95.377,29.845
  region net SVCC: 56.007,95.123 55.753,94.869 55.753,94.361 56.007,94.107 57.023,94.107 57.277,94.361 57.277,94.869 57.023,95.123
  region net SVCC: 52.07,90.043 51.816,89.789 51.816,89.027 53.34,89.027 53.34,89.789 53.086,90.043
  region net SGND: 52.451,92.583 52.832,92.456 53.086,92.202 53.086,90.742 52.527,90.602 52.197,90.932 52.197,92.456 52.324,92.583
  region net SGND: 52.959,97.155 52.705,96.901 52.705,96.647 53.086,96.266 54.356,96.266 54.483,96.393 54.483,96.647 53.975,97.155
  region net SVCC: 59.563,107.188 59.055,106.68 59.182,106.045 60.452,106.045 60.452,106.807 60.071,107.188
  region net SVCC: 52.197,106.807 51.943,106.553 51.943,106.172 52.07,106.045 52.197,106.045 52.324,106.045 54.483,106.045 54.61,106.68 54.483,106.807 54.356,106.807
  region net SVCC: 57.277,120.904 57.023,120.65 57.023,119.126 57.531,118.618 58.039,118.618 58.293,118.872 58.293,120.396 57.785,120.904
  region net SVCC: 51.308,120.904 50.927,120.523 50.927,120.015 51.308,119.634 51.943,119.634 51.943,120.904
  region net SVCC: 46.101,120.777 45.72,120.396 45.72,119.888 46.101,119.507 46.736,119.507 46.736,120.777
  region net SGND: 44.958,107.823 44.704,107.569 44.704,105.791 45.212,105.283 45.974,105.283 46.228,105.537 46.228,107.188 45.593,107.823
  region net SGND: 46.609,118.872 46.863,118.872 46.99,118.745 46.99,117.729 46.863,117.602 46.228,117.602 45.847,117.983 45.847,118.491 46.101,118.745
  region net SGND: 46.419,113.728 46.672,113.728 46.799,113.602 46.799,112.585 46.672,112.459 46.038,112.459 45.657,112.84 45.657,113.347 45.91,113.602

## Text inside footprints (layer, text, board x,y; h text height)
P1: Top Overlay "+" at 99.822,121.031 h0.76 r270
PSIG: Top Overlay "30" at 38.989,81.661 h1.27 r270; Top Overlay "29" at 36.449,81.661 h1.27 r270; Top Overlay "2" at 38.989,121.285 h1.27 r270; Top Overlay "1" at 36.449,121.285 h1.27 r270